# EAGLE board medi_5_cpx (EAGLE 6.0)

Size 38.1 x 30.48 mm. Coordinates in mm from the lower left corner, seen from the top.
Outline: 0,0 0,30.48 38.1,30.48 38.1,0 0,0
Copper layers (1*16): Top 0.035mm / dielectric 1.5mm / Bottom 0.035mm
Design rules: minimum track width 10mil, minimum drill 24mil, track to track 8mil, track to pad 8mil, pad to pad 8mil, via to via 8mil, smd to smd 8mil, copper to edge 40mil, drill to drill 8mil, minimum pad ring 10mil, minimum via ring 8mil, stop-mask expansion 4mil, vias tented up to drill 0mil, thermal gap 10mil
Holes 3.2 mm at 7.62,7.62 7.62,22.86 30.48,7.62 30.48,22.86

## Footprints (pad centres in the part's own frame; a part is rotated, then mirrored left to right if it is on the bottom)
LED5MM = drill 0.813 octagon: A -1.27,0; K 1.27,0
1X01 = drill 1.016 octagon: 1 0,0

## Placement (x,y rotation side)
00  [LED5MM]  3.81,3.81 0 top
01  [LED5MM]  11.43,3.81 0 top
02  [LED5MM]  19.05,3.81 0 top
03  [LED5MM]  26.67,3.81 0 top
04  [LED5MM]  34.29,3.81 0 top
10  [LED5MM]  3.81,11.43 0 top
11  [LED5MM]  11.43,11.43 0 top
12  [LED5MM]  19.05,11.43 0 top
13  [LED5MM]  26.67,11.43 0 top
14  [LED5MM]  34.29,11.43 0 top
20  [LED5MM]  3.81,19.05 0 top
21  [LED5MM]  11.43,19.05 0 top
22  [LED5MM]  19.05,19.05 0 top
23  [LED5MM]  26.67,19.05 0 top
24  [LED5MM]  34.29,19.05 0 top
30  [LED5MM]  3.81,26.67 0 top
31  [LED5MM]  11.43,26.67 0 top
32  [LED5MM]  19.05,26.67 0 top
33  [LED5MM]  26.67,26.67 0 top
34  [LED5MM]  34.29,26.67 0 top
H0  [1X01]  13.97,7.62 0 top
H1  [1X01]  16.51,7.62 0 top
H2  [1X01]  19.05,7.62 0 top
H3  [1X01]  21.59,7.62 0 top
H4  [1X01]  24.13,7.62 0 top

## Library data of the parts
00 01-04 10-14 20-24 30-34 = led
H0 H1-H4 = pinhead

## Nets
D: 00.A 04.K 11.A 14.K 22.A 24.K 33.A 34.K H4.1
S0: 00.K 01.A 02.A 03.A 04.A 10.K 20.K 30.K H0.1
S1: 01.K 10.A 11.K 12.A 13.A 14.A 21.K 31.K H1.1
S2: 02.K 12.K 20.A 21.A 22.K 23.A 24.A 32.K H2.1
S3: 03.K 13.K 23.K 30.A 31.A 32.A 33.K 34.A H3.1

## Tracks (layer width: path | path; a pad name or v marks a point on that pad's centre or on a via)
D  (8 unrouted)
S0  (8 unrouted)
S1  (8 unrouted)
S2  (8 unrouted)
S3  (8 unrouted)